# Altium PCB rpi_pico_shield_PCB.PcbDoc
Units mil, origin at the board's own origin, x right, y up, seen from the top; angles counter-clockwise.
Board outline 3800 x 3800 mil, 2 copper layers (Top Layer, Bottom Layer); 71 components, 51 nets, 232 pads, 43 vias.
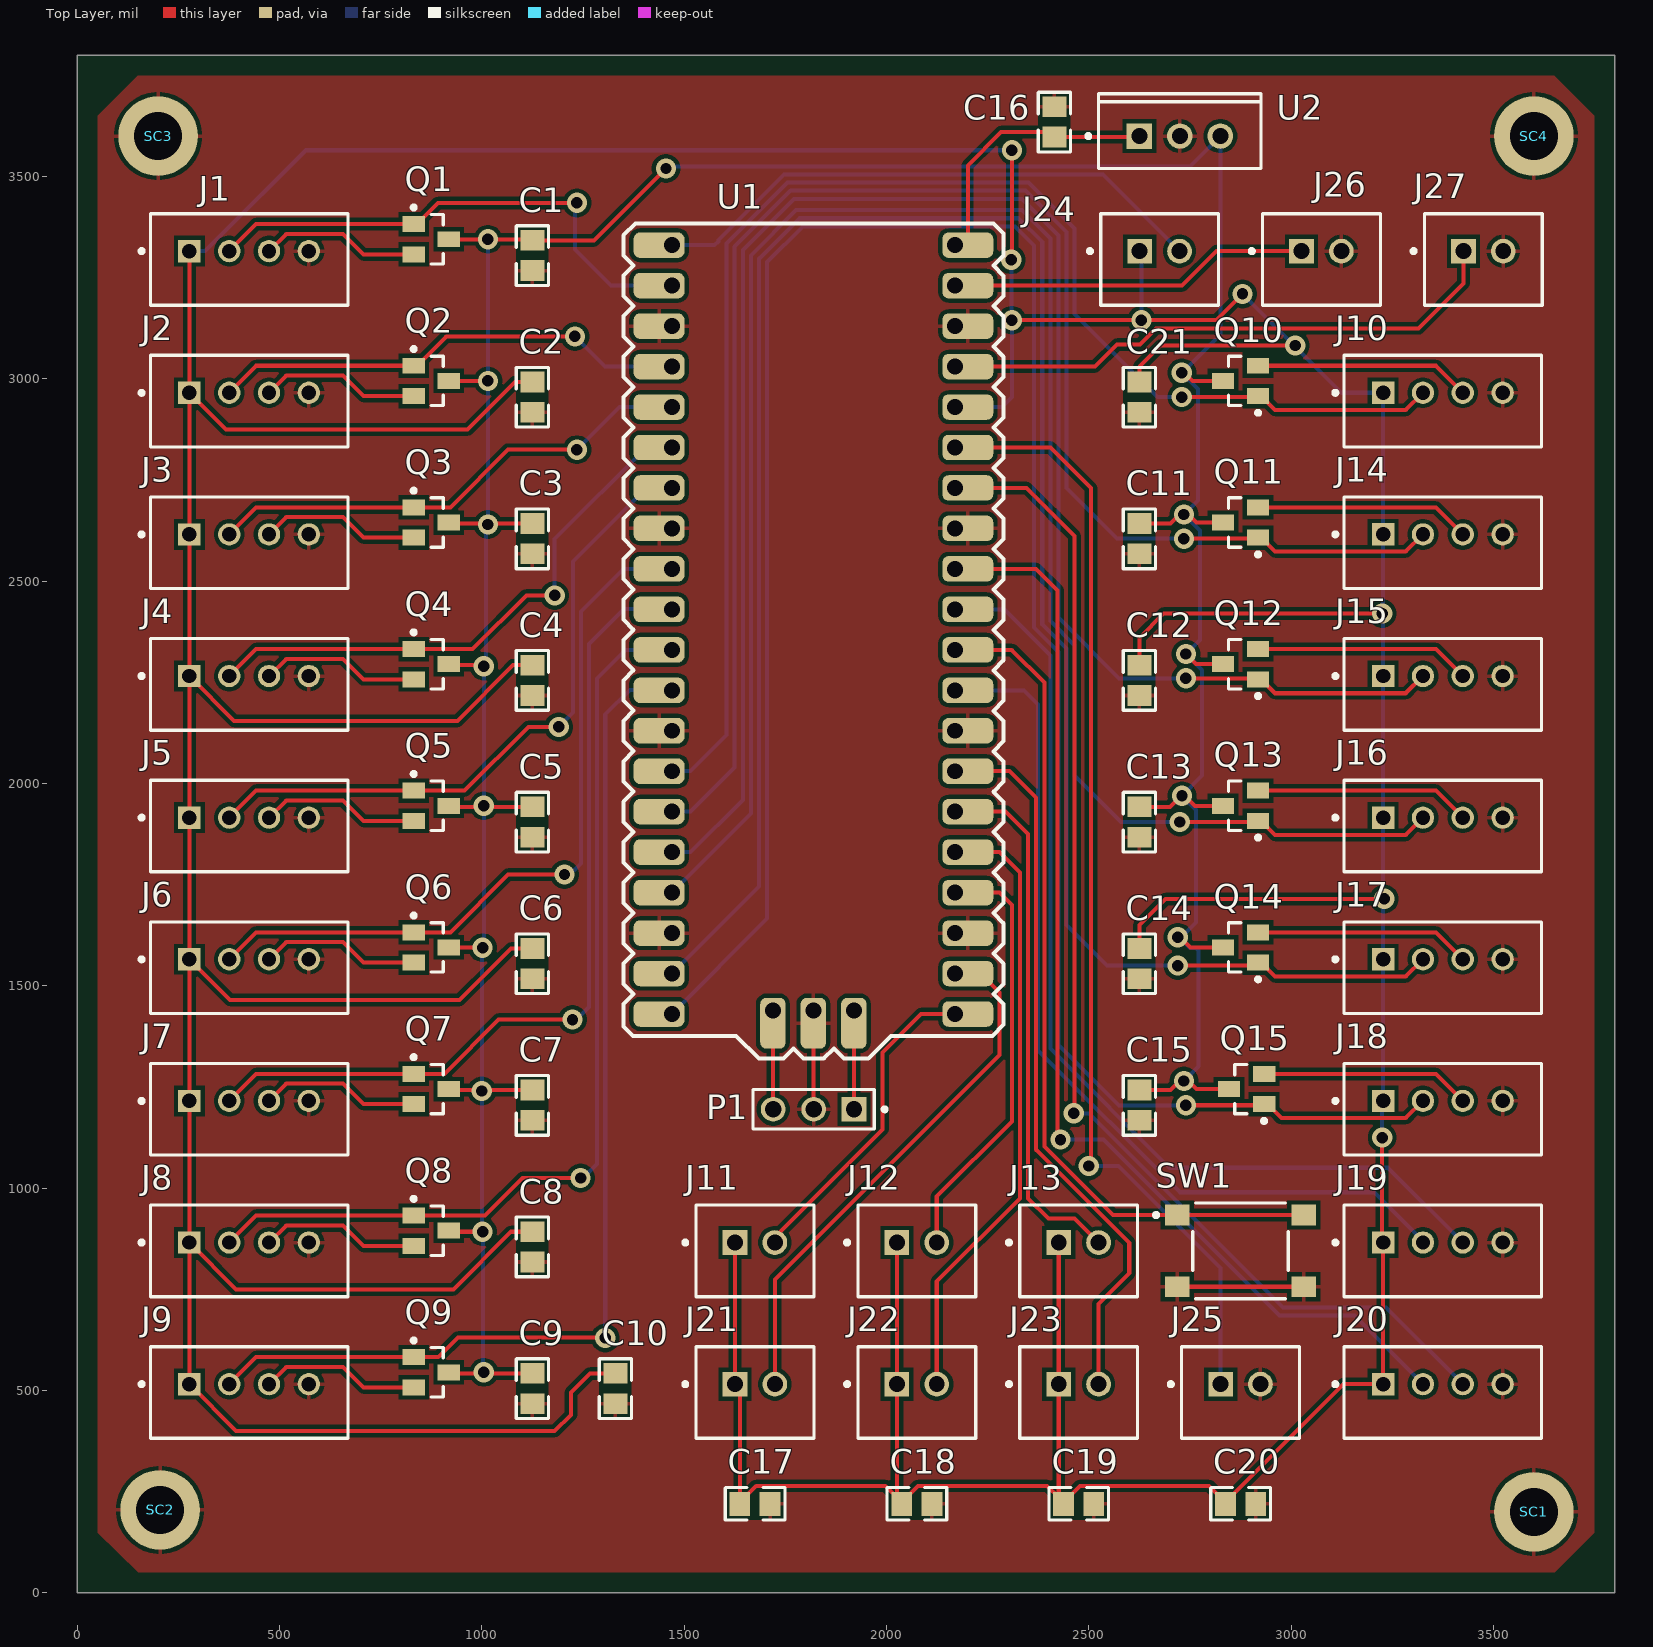
[diagram p0: Top Layer view]
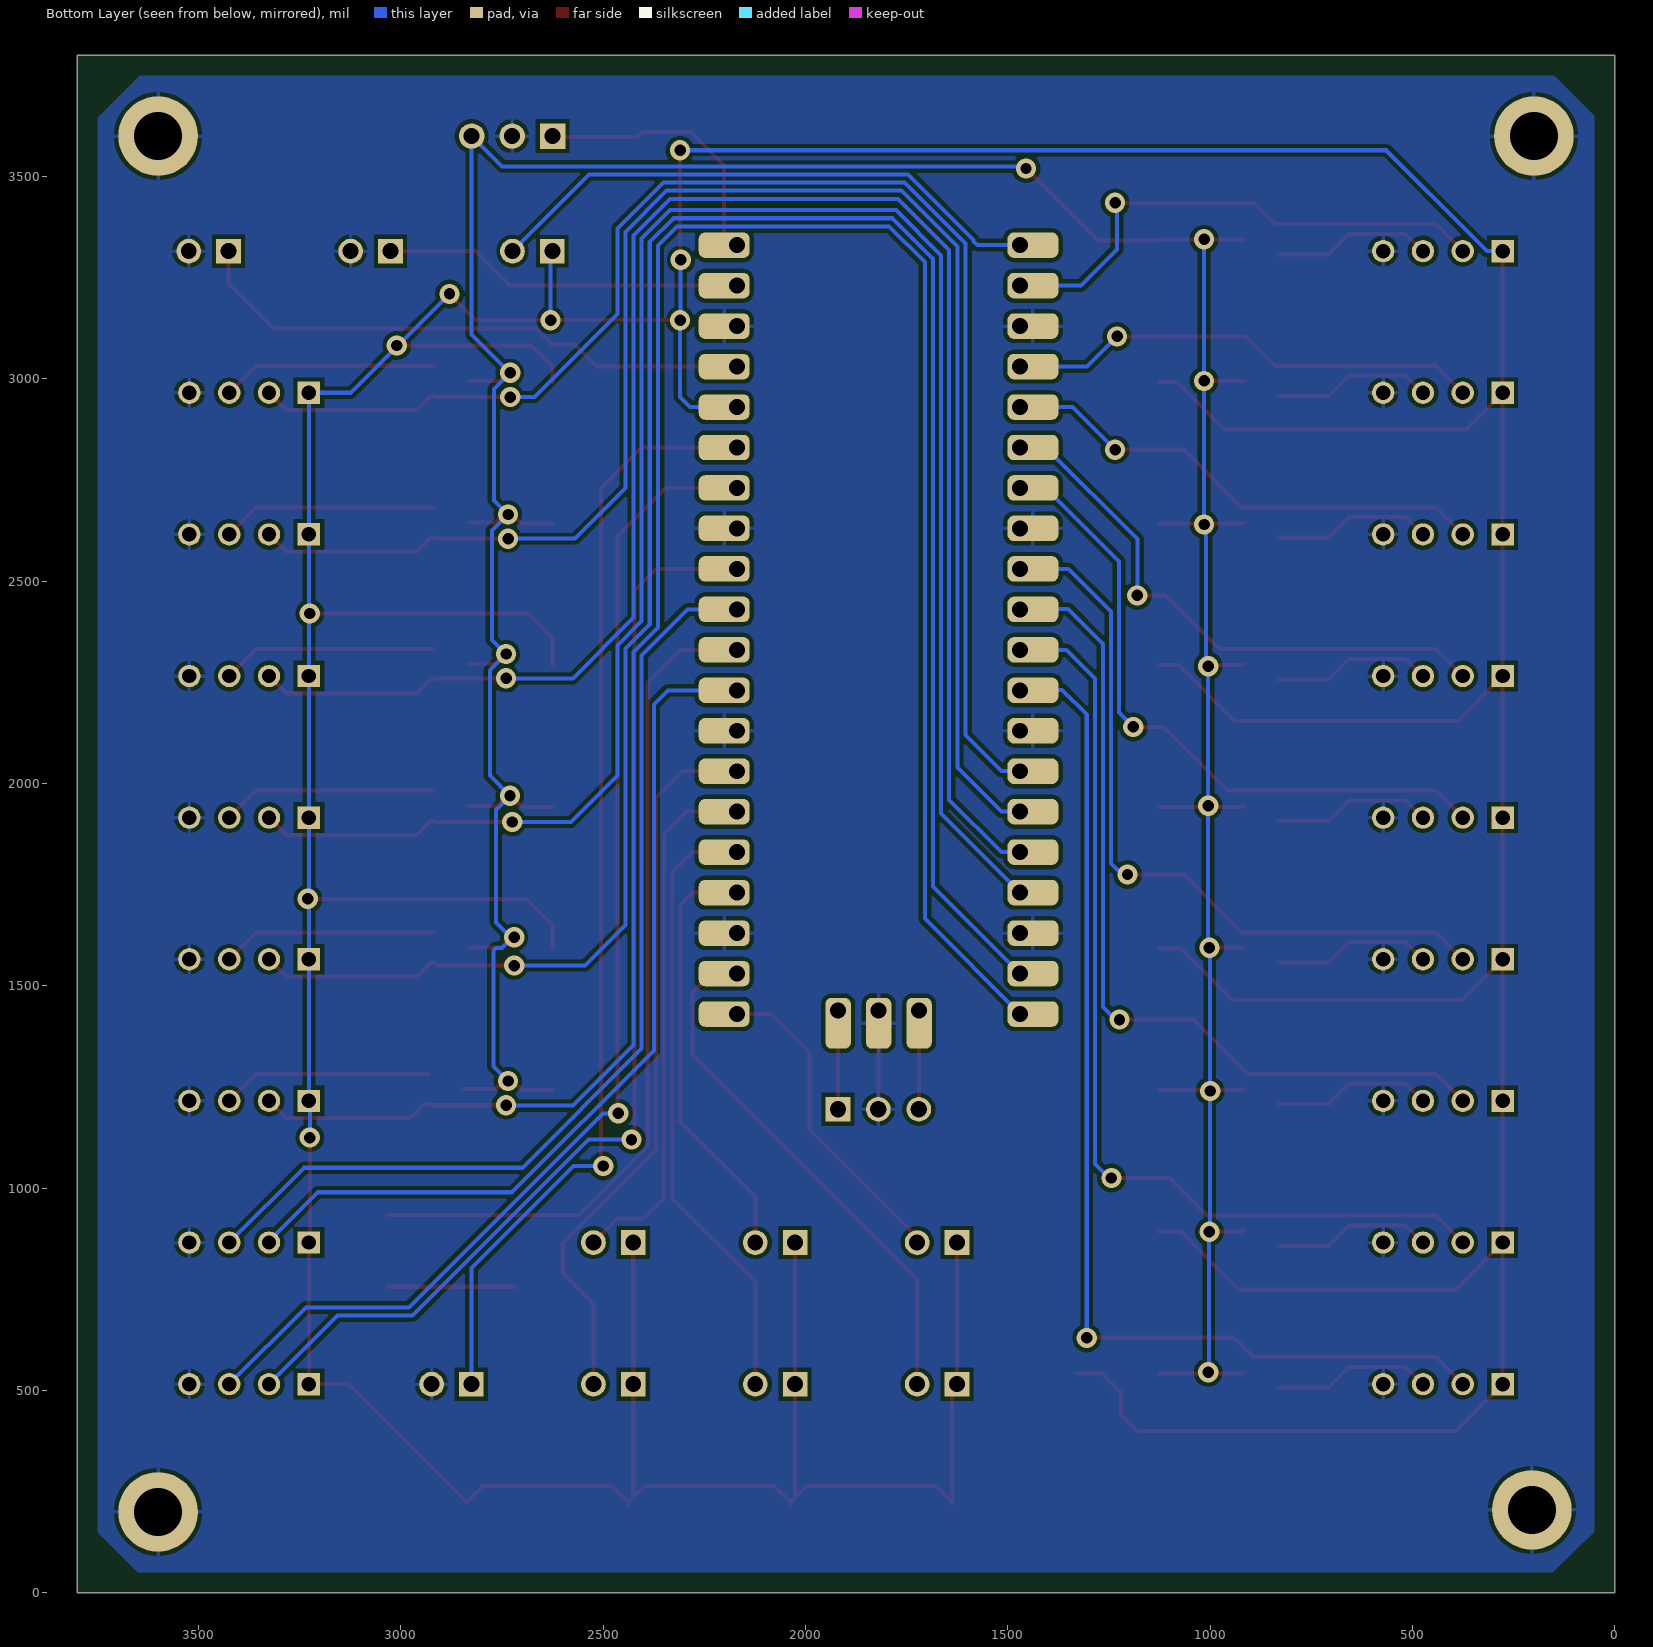
[diagram p1: Bottom Layer view, seen from below]
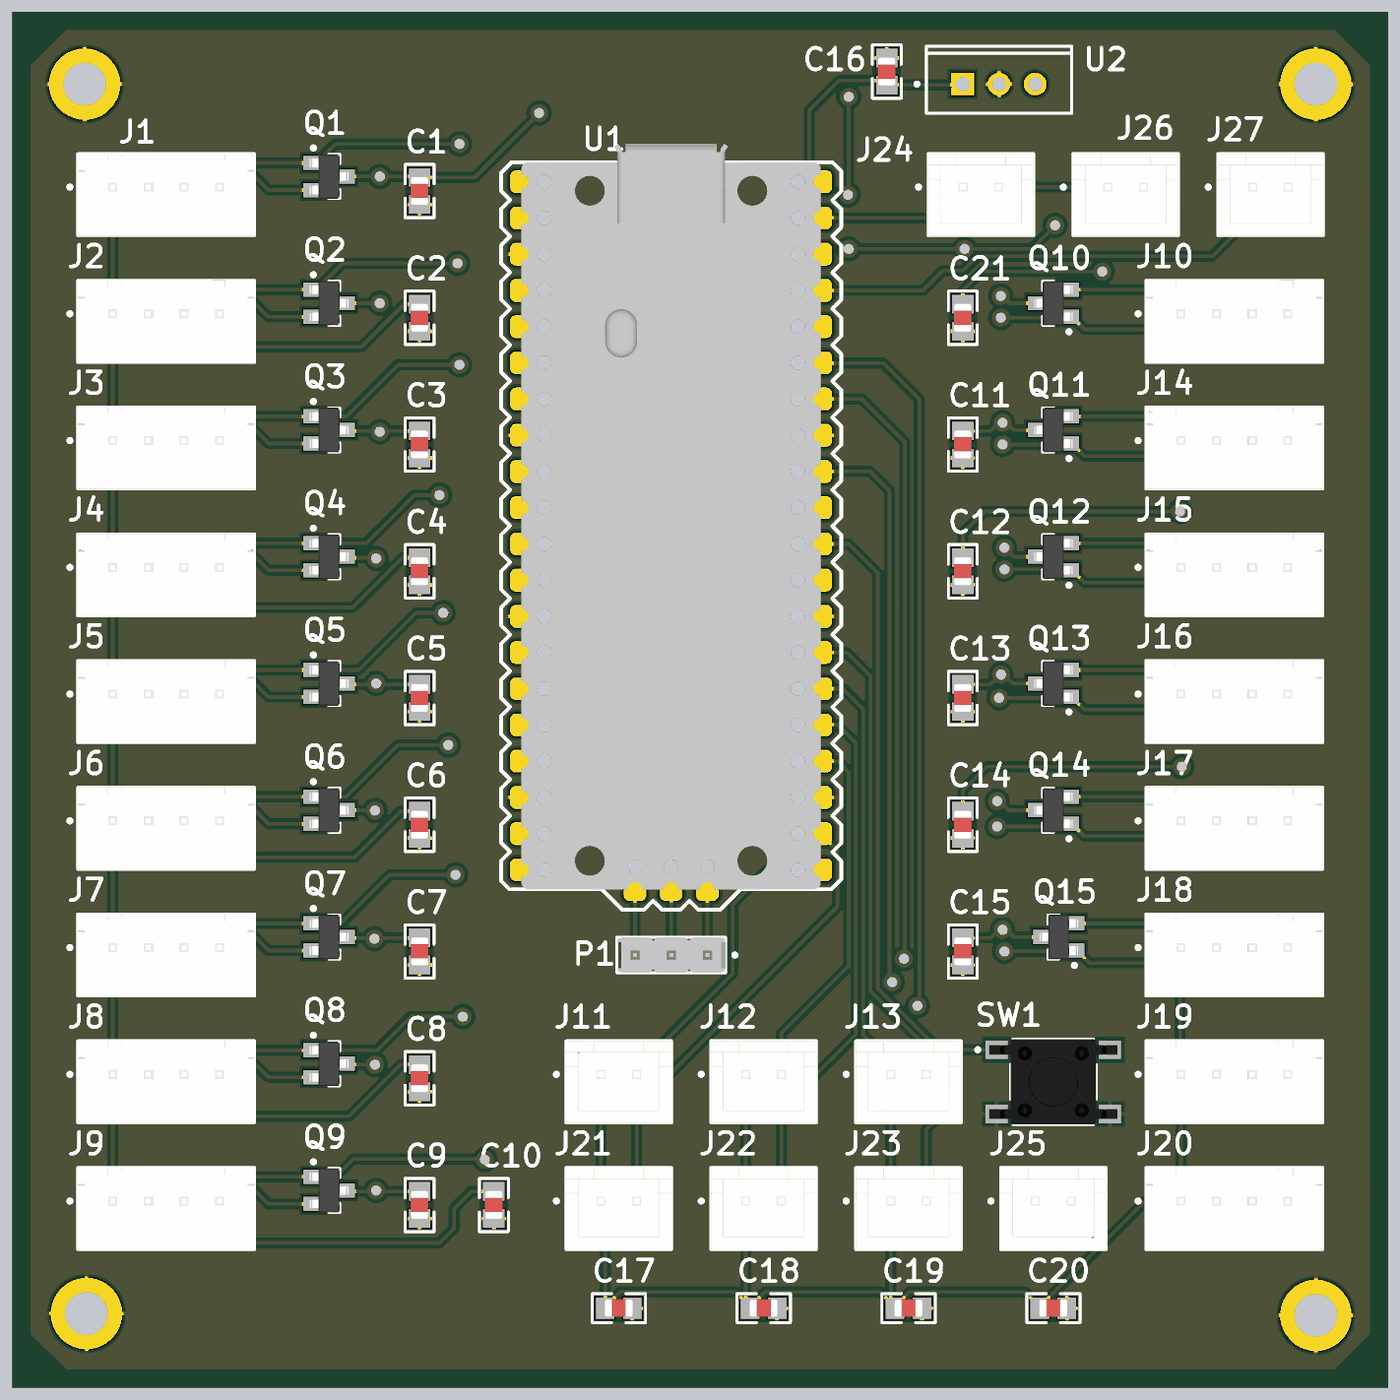
[diagram p2: 3D render of the assembled board from above, using the file's embedded part models]

## Layer stack, top to bottom
Top Solder: solder mask 0.4, Solder Resist, Dk 3.5
Top Layer: signal copper 1.4
Dielectric 1: dielectric 12.6, FR-4, Dk 4.8
Bottom Layer: signal copper 1.4
Bottom Solder: solder mask 0.4, Solder Resist, Dk 3.5

## Board outline
0,0 3800,0 3800,3800 0,3800

## Design rules (kind name [scope] priority, off if disabled: settings)
BoardOutlineClearance [All] p1: gap=50 ignorepadtopadclearanceinfootprint=FALSE
Clearance [All] p1: gap=10 ignorepadtopadclearanceinfootprint=FALSE
HoleSize HoleSize_1 [All] p1: absolutevalues=TRUE maxlimit=120 minlimit=1 maxpercent=80.000 minpercent=20.000
HoleSize [IsPad] p2: absolutevalues=TRUE maxlimit=120 minlimit=1 maxpercent=80.000 minpercent=20.000
PolygonConnect [All] p1: connectstyle=Relief reliefconductorwidth=10 reliefentries=4 polygonreliefangle="90 Angle" airgapwidth=10
RoomDefinition shield [InComponentClass('shield')] p1: confinementstyle=ConfineIn formatcopy=TRUE lockcomponents=FALSE outline 0,0 3795,0 3795,3795 0,3795
RoutingVias RoutingVias_1 [InNetClass('All Nets')] p1: holewidth=28 width=50 viastyle="Through Hole" minholewidth=28 minwidth=50 maxholewidth=120 maxwidth=200
RoutingVias [All] p2: holewidth=20 width=50 viastyle="Through Hole" minholewidth=20 minwidth=40 maxholewidth=80 maxwidth=120
SilkToSolderMaskClearance SilkToSolderMaskClearance_1 [All] p1: minsilkscreentomaskgap=2 clearancetoexposedcopper=TRUE
SilkToSolderMaskClearance [IsPad] p2: minsilkscreentomaskgap=5 clearancetoexposedcopper=TRUE
SolderMaskExpansion [All] p1: expansion=4 istentingtop=FALSE
Width [All] p1: maxlimit=10 minlimit=10 preferedwidth=10
28 further rules are at their usual default settings.

## Classes and differential pairs
component class rpi_pico: U1

## Components (designator, comment, footprint, x,y, rotation, side; value= is the part's Value field where it differs from the comment)
C1 "100nF" 0805C 1125,3305 r270 top
C2 "100nF" 0805C 1125,2955 r270 top
C3 "100nF" 0805C 1125,2605 r270 top
C4 "100nF" 0805C 1125,2255 r270 top
C5 "100nF" 0805C 1125,1905 r270 top
C6 "100nF" 0805C 1125,1555 r270 top
C7 "100nF" 0805C 1125,1205 r270 top
C8 "100nF" 0805C 1125,855 r270 top
C9 "100nF" 0805C 1125,505 r270 top
C10 "100nF" 0805C 1330,505 r270 top
C11 "100nF" 0805C 2625,2605 r270 top
C12 "100nF" 0805C 2625,2255 r270 top
C13 "100nF" 0805C 2625,1905 r270 top
C14 "100nF" 0805C 2625,1555 r270 top
C15 "100nF" 0805C 2625,1205 r270 top
C16 "100nF" 0805C 2415,3635 r270 top
C17 "100nF" 0805C 1675,220 r0 top
C18 "100nF" 0805C 2075,220 r0 top
C19 "100nF" 0805C 2475,220 r0 top
C20 "100nF" 0805C 2875,220 r0 top
C21 "100nF" 0805C 2625,2955 r270 top
J1 "B4B-XH-A(LF)(SN)" FP-B4B-XH-A_LF_SN-MFG 425,3295 r180 top
J2 "B4B-XH-A(LF)(SN)" FP-B4B-XH-A_LF_SN-MFG 425,2945 r180 top
J3 "B4B-XH-A(LF)(SN)" FP-B4B-XH-A_LF_SN-MFG 425,2595 r180 top
J4 "B4B-XH-A(LF)(SN)" FP-B4B-XH-A_LF_SN-MFG 425,2245 r180 top
J5 "B4B-XH-A(LF)(SN)" FP-B4B-XH-A_LF_SN-MFG 425,1895 r180 top
J6 "B4B-XH-A(LF)(SN)" FP-B4B-XH-A_LF_SN-MFG 425,1545 r180 top
J7 "B4B-XH-A(LF)(SN)" FP-B4B-XH-A_LF_SN-MFG 425,1195 r180 top
J8 "B4B-XH-A(LF)(SN)" FP-B4B-XH-A_LF_SN-MFG 425,845 r180 top
J9 "B4B-XH-A(LF)(SN)" FP-B4B-XH-A_LF_SN-MFG 425,495 r180 top
J10 "B4B-XH-A(LF)(SN)" FP-B4B-XH-A_LF_SN-MFG 3375,2945 r180 top
J11 "B2B-XH-A(LF)(SN)" FP-B2B-XH-A_LF_SN-MFG 1675,845 r0 top
J12 "B2B-XH-A(LF)(SN)" FP-B2B-XH-A_LF_SN-MFG 2075,845 r0 top
J13 "B2B-XH-A(LF)(SN)" FP-B2B-XH-A_LF_SN-MFG 2475,845 r0 top
J14 "B4B-XH-A(LF)(SN)" FP-B4B-XH-A_LF_SN-MFG 3375,2595 r180 top
J15 "B4B-XH-A(LF)(SN)" FP-B4B-XH-A_LF_SN-MFG 3375,2245 r180 top
J16 "B4B-XH-A(LF)(SN)" FP-B4B-XH-A_LF_SN-MFG 3375,1895 r180 top
J17 "B4B-XH-A(LF)(SN)" FP-B4B-XH-A_LF_SN-MFG 3375,1545 r180 top
J18 "B4B-XH-A(LF)(SN)" FP-B4B-XH-A_LF_SN-MFG 3375,1195 r180 top
J19 "B4B-XH-A(LF)(SN)" FP-B4B-XH-A_LF_SN-MFG 3375,845 r180 top
J20 "B4B-XH-A(LF)(SN)" FP-B4B-XH-A_LF_SN-MFG 3375,495 r180 top
J21 "B2B-XH-A(LF)(SN)" FP-B2B-XH-A_LF_SN-MFG 1675,495 r0 top
J22 "B2B-XH-A(LF)(SN)" FP-B2B-XH-A_LF_SN-MFG 2075,495 r0 top
J23 "B2B-XH-A(LF)(SN)" FP-B2B-XH-A_LF_SN-MFG 2475,495 r0 top
J24 "B2B-XH-A(LF)(SN)" FP-B2B-XH-A_LF_SN-MFG 2675,3295 r0 top
J25 "B2B-XH-A(LF)(SN)" FP-B2B-XH-A_LF_SN-MFG 2875,495 r0 top
J26 "B2B-XH-A(LF)(SN)" FP-B2B-XH-A_LF_SN-MFG 3075,3295 r0 top
J27 "B2B-XH-A(LF)(SN)" FP-B2B-XH-A_LF_SN-MFG 3475,3295 r0 top
P1 "22-28-4033" MOLX-22-28-4033_V 1820,1195 r180 top
Q1 "NDS7002A" FAIR-SOT23-3_V 875,3345 r0 top
Q2 "NDS7002A" FAIR-SOT23-3_V 875,2995 r0 top
Q3 "NDS7002A" FAIR-SOT23-3_V 875,2645 r0 top
Q4 "NDS7002A" FAIR-SOT23-3_V 875,2295 r0 top
Q5 "NDS7002A" FAIR-SOT23-3_V 875,1945 r0 top
Q6 "NDS7002A" FAIR-SOT23-3_V 875,1595 r0 top
Q7 "NDS7002A" FAIR-SOT23-3_V 875,1245 r0 top
Q8 "NDS7002A" FAIR-SOT23-3_V 875,895 r0 top
Q9 "NDS7002A" FAIR-SOT23-3_V 875,545 r0 top
Q10 "NDS7002A" FAIR-SOT23-3_V 2875,2995 r180 top
Q11 "NDS7002A" FAIR-SOT23-3_V 2875,2645 r180 top
Q12 "NDS7002A" FAIR-SOT23-3_V 2875,2295 r180 top
Q13 "NDS7002A" FAIR-SOT23-3_V 2875,1945 r180 top
Q14 "NDS7002A" FAIR-SOT23-3_V 2875,1595 r180 top
Q15 "NDS7002A" FAIR-SOT23-3_V 2890,1245 r180 top
SC1 "Screw_Hole" Screw_Hole 3600,200 r0 top
SC2 "Screw_Hole" Screw_Hole 205,205 r0 top
SC3 "Screw_Hole" Screw_Hole 200,3600 r0 top
SC4 "Screw_Hole" Screw_Hole 3600,3600 r0 top
SW1 "PTS645SH50SMTR92LFS" FP-PTS645SH50SMTR92LFS-MFG 2875,845 r0 top
U1 "RaspberryPi_Pico" PiPico_Holes 1375,1345 r0 top
U2 "LM7805ACT" FAIR-TO-220-3 2725,3600 r90 top

## Footprints (in the part's own frame and the unit in brackets; to place one, negate y for a bottom-side part, rotate by r counter-clockwise, add the part's x,y. Pads: shape width x height; smd on the part's side, far side on the other; paste and mask are expansions set on the pad)
0805C [mm] "0805 Footprint"
  rect 1.3x1.5 smd: 1(-0.95,0) 2(0.95,0)
  silkscreen extent -1.87,-1.02 1.88,1.02, body extent -1,-0.62 1,0.63, height 0.78
FAIR-SOT23-3_V [mm] "SOT23, 3-Leads, Body 3.12x1.5mm, Pitch 0.95mm"
  rect 1.4x1 smd: 1(-1.1,0.95) 2(-1.1,-0.95) 3(1.1,0)
  silkscreen extent -1.22,-1.55 0.75,2.12, body extent -1.35,-1.56 1.35,1.56, height 1.2
FAIR-TO-220-3 [mm] "FM, 3-Leads, Body 10.2x4.7mm, Pitch 2.54mm"
  rect 1.6x1.6 hole 1: 1(0,2.54)
  round 1.6 hole 1: 2(0,0) 3(0,-2.54)
  silkscreen extent -2.04,-5.1 2.66,5.87, body extent -2.04,-5.1 2.66,5.1, height 18.95
FP-B2B-XH-A_LF_SN-MFG [mm]
  rect 1.55x1.55 hole 1 paste-1000 mask+0: 1(-1.25,0.525)
  round 1.55 hole 1 paste-1000 mask+0: 2(1.25,0.525)
  silkscreen extent -4.5,-2.88 3.7,2.88, body extent -3.8,-2.98 3.8,2.98, height 0.25
FP-B4B-XH-A_LF_SN-MFG [mm]
  rect 1.4x1.4 hole 0.9 paste-1000 mask+0: 1(3.75,-0.525)
  round 1.4 hole 0.9 paste-1000 mask+0: 2(1.25,-0.525) 3(-1.25,-0.525) 4(-3.75,-0.525)
  silkscreen extent -6.2,-2.88 6.87,2.88, body extent -6.3,-2.98 6.3,2.98, height 0.25
FP-PTS645SH50SMTR92LFS-MFG [mm]
  rect 1.55x1.3 smd paste+0 mask+0: 1(-3.975,2.25) 2(3.975,2.25) 3(-3.975,-2.25) 4(3.975,-2.25)
  silkscreen extent -5.42,-3 3,3, body extent -4.85,-3.1 4.85,3.1, height 0.25
MOLX-22-28-4033_V [mm] "THD, 3-Leads, Body 7.62x2.49mm, Pitch 2.54mm"
  rect 1.55x1.55 hole 1.02: 1(-2.54,0)
  round 1.55 hole 1.02: 2(0,0) 3(2.54,0)
  silkscreen extent -4.59,-1.24 3.81,1.24, body extent -3.81,-1.24 3.81,1.24, height 8.38
PiPico_Holes [mm]
  rrect50% 3.2x1.6 hole 1 copper offset -0.8,0: 1(2.4,50.43) 2(2.4,47.89) 3(2.4,45.35) 4(2.4,42.81) 5(2.4,40.27) 6(2.4,37.73) 7(2.4,35.19) 8(2.4,32.65) 9(2.4,30.11) 10(2.4,27.57) 11(2.4,25.03) 12(2.4,22.49) 13(2.4,19.95) 14(2.4,17.41) 15(2.4,14.87) 16(2.4,12.33) 17(2.4,9.79) 18(2.4,7.25) 19(2.4,4.71) 20(2.4,2.17)
  rrect50% 3.2x1.6 hole 1 copper offset 0.8,0: 21(20.18,2.17) 22(20.18,4.71) 23(20.18,7.25) 24(20.18,9.79) 25(20.18,12.33) 26(20.18,14.87) 27(20.18,17.41) 28(20.18,19.95) 29(20.18,22.49) 30(20.18,25.03) 31(20.18,27.57) 32(20.18,30.11) 33(20.18,32.65) 34(20.18,35.19) 35(20.18,37.73) 36(20.18,40.27) 37(20.18,42.81) 38(20.18,45.35) 39(20.18,47.89) 40(20.18,50.43)
  rrect50% 1.6x3.2 hole 1 copper offset 0,-0.8: 41(8.75,2.39) 42(11.29,2.39) 43(13.83,2.39)
  silkscreen extent -0.64,-0.64 23.23,51.8, body extent 0.79,0.8 21.79,53.1, height 3.74
Screw_Hole [mm]
  round 5 hole 3: ""(0,0)

## Part data
C1 C2 C3 C4 C5 C6 C7 C8 C9 C10 C11 C12 C13 C14 C15 C16 C17 C18 C19 C20 C21: library part C, "Capacitor", Reviewed by="RM - 2018/08/05", Revision="July-2002: Re-released for DXP Platform."
J1 J2 J3 J4 J5 J6 J7 J8 J9 J10 J14 J15 J16 J17 J18 J19 J20: library part CMP-17439-000250-1, "CONN HEADER VERT 4POS 2.5MM", Color=Natural, Contact Resistance=20mR, Current Rating=3A, Flammability Rating="UL94 V-0", Housing Color=White, Insulation Resistance=1GR, Max Operating Temperature=85°C, Max Voltage Rating (AC)=250V, Min Operating Temperature=-25°C, Package Quantity=500, Connector Type=Header, Contact Finish - Mating=TIN, Contact Material=Brass, Contact Plating=Tin, Contact Shape=Square, Contact Type="Male Pin", Depth=5.75mm, Fastening Type=Detent, Gender=Male, Housing Material=Polyamide, Insulation Color=Natural, Insulation Material=Nylon, Lead Free="Lead Free", Lead Pitch=2.5mm, Length=12.4mm, Mated Stacking Heights=9.8mm, Material=Polyamide, Max Current Rating=3A, Max Voltage Rating (DC)=250V, Mount="Through Hole", Number of Contacts=4, Number of Positions=4, Number of Rows=1, Orientation=Straight, Packaging=Bulk, Pitch=2.5mm, REACH SVHC="No SVHC", Series=XH, Termination=Solder, Voltage Rating=250V, Voltage Rating (AC)=250V, Wire/Cable Gauge=22AWG
J11 J12 J13 J21 J22 J23 J24 J25 J26 J27: library part CMP-2000-05888-3, "CONN HEADER VERT 2POS 2.5MM", Color=Natural, Contact Resistance=20mR, Current Rating=3A, Housing Color=White, Insulation Resistance=1GR, Max Operating Temperature=85°C, Max Voltage Rating (AC)=250V, Min Operating Temperature=-25°C, Connector Type="Male Pin", Contact Material=Brass, Contact Plating=Tin, Contact Type="Male Pin", Depth=5.75mm, Fastening Type=Detent, Housing Material=Polyamide, Lead Free="Lead Free", Lead Pitch=2.5mm, Length=7.4mm, Max Current Rating=3A, Max Voltage Rating (DC)=250V, Mount="Through Hole", Number of Contacts=2, Number of Positions=2, Number of Rows=1, Orientation=Straight, Packaging=Bulk, Pitch=2.5mm, REACH SVHC="No SVHC", Series=XH, Termination=Solder, Voltage Rating=250V, Voltage Rating (AC)=250V, Wire/Cable Gauge=22AWG
P1: library part CMP-1676-00001-5, "Male Header, Pitch 2.54 mm, 1 x 3 Position, Height 8.38 mm, Tail Length 3.18 mm, RoHS, Bulk", Colour=Black, Current Rating="4 A", Manufacturer=Molex, Max Operating Temperature="75 degC", Min Operating Temperature="0 degC", Package Quantity=1, Voltage Rating="250 V", ComponentLink1Description="Manufacturer URL", ComponentLink1URL=http://www.molex.com/, ComponentLink2Description=Datasheet, ComponentLink2URL=http://www.molex.com/pdm_docs/sd/022284033_sd.pdf, Contact Finish=Gold, Contact Material=Brass, Contact Plating=Gold, DatasheetVersion="Rev. G, 01/2012", Height="8.38 mm", Lead Pitch="0.1 inch", Length="7.62 mm", Mount="Through Hole", Mounting Technology="Through Hole", PackageDescription="Male Header, Pitch 2.54 mm, 1 x 3 Position, Height 8.38 mm, Tail Length 3.18 mm", PackageReference=22-28-4033, Packaging=Bulk, Pins=3, REACH SVHC=Unknown, RoHSCompliant=true, Rows=1
Q1 Q2 Q3 Q4 Q5 Q6 Q7 Q8 Q9 Q10 Q11 Q12 Q13 Q14 Q15: library part CMP-2000-06836-1, "N-Channel Enhancement Mode Field Effect Transistor, 60 V, 280 mA, -65 to 150 degC, 3-Pin SOT23 (TO-236AB), RoHS, Tape and Reel", Continuous Drain Current Id=280mA, Current Temperature=25°C, Drain Source Voltage Vds=60V, Manufacturer="Fairchild Semiconductor", On Resistance Rds(on)=2ohm, Operating Temperature Max=150°C, Operating Temperature Min=-65°C, Operating Temperature Range=-65°Cto+150°C, Package Description="3-Pin Small Outline Transistor, Body 2.92 x 1.325 mm, Pitch 0.95 mm", Package Reference=SOT23-3, Package Version="Rev. 12, 03/2016", Power Dissipation Pd=300mW, Pulse Current Idm=1.5A, Rds(on) Test Voltage Vgs=10V, Threshold Voltage Vgs=2.1V, Transistor Case Style=SOT-23, Voltage Vgs th Max=2.5V, Current Id Max=280mA, Datasheet URL=https://www.fairchildsemi.com/datasheets/ND/NDS7002A.pdf, Datasheet Version="Rev. 2.10, 08/2016", Device Marking=NDS7002A, External Depth=2.5mm, External Length / Height=1.12mm, External Width=3.05mm, Full Power Rating Temperature=25°C, Manufacturer URL=https://www.fairchildsemi.com/, Mounting Technology=SurfaceMount, MSL=MSL1-Unlimited, No. of Pins=3, No. of Transistors=1, Package URL=http://www.fairchildsemi.com/dwg/MA/MA03D.pdf, Packaging=CutTape, SMD Marking=712, SVHC=NoSVHC(16-Jun-2014), Tape Width=8mm, Transistor Polarity=NChannel, Voltage Vds Typ=60V, Voltage Vgs Max=2.1V, Voltage Vgs Rds on Measurement=10V
SC1 SC2 SC3 SC4: "Screw Hole"
SW1: library part CMP-10040-000028-1, "SWITCH TACTILE SPST-NO 0.05A 12V", Case/Package=SMD/SMT, Color=Black, Current Rating=50mA, Max Operating Temperature=60°C, Max Voltage Rating (DC)=12V, Min Operating Temperature=-20°C, Operating Force=200gf, Package Quantity=1000, Actuator Material=Nylon, Actuator Type=Standard, Contact Material=Bronze, Contact Plating=Silver, Depth=9mm, Illumination Type=Non-Illuminated, Lead Free="Lead Free", Length=6mm, Max Current Rating=50mA, Mechanical Life=100000Cycles, Mount="Surface Mount", Orientation=Straight, Packaging="Tape and Reel", REACH SVHC="No SVHC", Switch Function=Off-Mom, Termination="Gull Wing", Throw Configuration=SPST, Voltage Rating (DC)=12V
U2: library part CMP-2000-04937-1, "Positive Voltage Regulator, 5 V, 1 A, 0 to 125 degC, 3-Pin TO-220, RoHS, Tube", Dropout Voltage Measurement Current=1A, Manufacturer=Fairchild, Maximum Input Voltage=35V, Maximum Operating Temperature=+125degC, Minimum Operating Temperature=0degC, Output Voltage=5V, Package Description="3-Pin Through Hole Device, Body 10 x 4.5 mm, Pitch 2.54 mm", Package Reference=TO-220, Quiescent Current=6mA, Typical Dropout Voltage @ Current=2V@1A, Datasheet URL=https://datasheet.ciiva.com/5816/1359194-5816420.pdf, Datasheet Version="Rev. 1.0.1, 05/2006", Dimensions=10.67x4.83x16.51mm, Height=16.51mm, Length=10.67mm, Line Regulation=50mV, Load Regulation=100mV, Manufacturer URL=https://www.fairchildsemi.com/, Maximum Output Current=1A, Mounting Type=ThroughHole, Number of Outputs=1, Output Type=Fixed, Package Type=TO-220, Package URL=https://www.fairchildsemi.com/package-drawings/TO/TO220B03.pdf, Pin Count=3, Polarity=Positive, Regulator Function=Linear, Series=LM78xx, Width=4.83mm

## Via types
v1: diameter 50, hole 28, Top Layer to Bottom Layer, tented both sides, 43 vias

## Nets (pads, with @x,y where several pads share a name; then routed paths per layer and width w, separated by ;. In a path a pad name is that pad's centre, name@x,y a point inside that pad or via, vN(x,y) a via of type N, cw(c..) or ccw(c..) an arc to the next point about the centre after c; other vN are vias at no path point)
3V3_EN: J27.1 U1.37 | length 1421.2
  Top Layer w10: U1.37 2515.43,3030.43 2570,3085 2626.57,3085 2666.57,3125 3315,3125 3425.79,3235.79 J27.1
ADC_VREF: J25.1 U1.35 | length 2771.5
  Top Layer w10: U1.35 2169.92,2830 2405,2830 2505,2730 2505,1060 v1(2500,1055)
  Bottom Layer w10: v1(2500,1055) 2573.43,1055 2825.79,802.64 J25.1
DVCC: C2.1 C4.1 C6.1 C8.1 C10.1 C12.1 C14.1 C17.1 C18.1 C19.1 C20.1 C21.1 J1.1 J2.1 J3.1 J4.1 J5.1 J6.1 J7.1 J8.1 J9.1 J10.1 J11.1 J12.1 J13.1 J14.1 J15.1 J16.1 J17.1 J18.1 J19.1 J20.1 J21.1 J22.1 J23.1 J24.1 U1.36 | length 19896.6
  Top Layer w10: J1.1 J2.1 ; C8.1 1072.4,892.4 930,750 393.03,750 J8.1 ; C6.1 1072.4,1592.4 945,1465 378.03,1465 J6.1 ; C4.1 1077.4,2292.4 940,2155 388.03,2155 J4.1 ; C2.1 1082.4,2992.4 965,2875 368.03,2875 J2.1 ; C10.1 1267.4,542.4 1220,495 1220,440 1180,400 393.03,400 J9.1 J8.1 ; J11.1 J21.1 1637.6,503.86 C17.1@1637.6,223.94 ; C17.1 C17.1@1637.6,223.94 ; J12.1 J22.1 C18.1@2025.79,235.75 ; C18.1 C18.1@2037.6,223.94 ; v1(2308.23,3294.24) 2310,3296.01 v1(2310,3565) ; v1(2310,3145) v1(2630,3145) 2815,3145 v1(2880,3210) ; J13.1 J23.1 C19.1@2425.79,235.75 ; C19.1 C19.1@2437.6,223.94 ; C14.1 2625,1650 2690,1715 v1(3230,1715) ; C12.1 2625,2360 2685,2420 v1(3225,2420) ; C21.1 2625,3030 2677.31,3082.31 v1(3010.05,3082.31) ; v1(3225,1125) 3225,868.03 J19.1 J20.1 3129.33,515.67 2837.6,223.94 2797.01,264.53 2478.19,264.53 C19.1@2437.6,223.94 ; J8.1 J7.1 J6.1 ; J6.1 J5.1 J4.1 ; J4.1 J3.1 J2.1 ; C17.1@1637.6,223.94 1678.19,264.53 1997.01,264.53 C18.1@2025.79,235.75 ; C18.1@2025.79,235.75 C18.1@2037.6,223.94 ; C18.1@2037.6,223.94 2078.19,264.53 2397.01,264.53 C19.1@2425.79,235.75 ; C19.1@2425.79,235.75 C19.1@2437.6,223.94
  Bottom Layer w10: J1.1 315.67,3315.67 344.28,3344.28 cw(c375.79,3315.67) 347.18,3347.18 565,3565 v1(2310,3565) ; U1.36 2285.43,2930.43 2310,2955 v1(2310,3145) 2309.12,3145.88 2309.12,3293.36 v1(2308.23,3294.24) ; J24.1 2630,3311.46 v1(2630,3145) ; v1(2880,3210) 3124.33,2965.67 J10.1 J14.1 J15.1 J16.1 J17.1 J18.1 3225,1213.31 v1(3225,1125)
GND: C1.2 C2.2 C3.2 C4.2 C5.2 C6.2 C7.2 C8.2 C9.2 C10.2 C11.2 C12.2 C13.2 C14.2 C15.2 C16.1 C17.2 C18.2 C19.2 C20.2 C21.2 J1.4 J2.4 J3.4 J4.4 J5.4 J6.4 J7.4 J8.4 J9.4 J10.4 J14.4 J15.4 J16.4 J17.4 J18.4 J19.4 J20.4 J25.2 J26.2 J27.2 P1.2 SC1. SC2. SC3. SC4. SW1.3 SW1.4 U1.3 U1.8 U1.13 U1.18 U1.23 U1.28 U1.33 U1.38 U1.42 U2.2 | length 557.3
  Top Layer w10: U1.42 1820,1438.58 P1.2 ; SW1.3 SW1.4
LED01: J1.3 Q1.2 | length 396.1
  Top Layer w10: J1.3 516.77,3358.23 656.77,3358.23 707.4,3307.6 Q1.2
LED02: J2.3 Q2.2 | length 396.1
  Top Layer w10: J2.3 516.77,3008.23 656.76,3008.23 707.39,2957.6 Q2.2
LED03: J3.3 Q3.2 | length 396.1
  Top Layer w10: J3.3 516.77,2658.23 656.76,2658.23 707.39,2607.6 Q3.2
LED04: J4.3 Q4.2 | length 396.1
  Top Layer w10: J4.3 516.77,2308.23 656.76,2308.23 707.39,2257.6 Q4.2
LED05: J5.3 Q5.2 | length 396.1
  Top Layer w10: J5.3 516.77,1958.23 656.76,1958.23 707.39,1907.6 Q5.2
LED06: J6.3 Q6.2 | length 396.1
  Top Layer w10: J6.3 516.77,1608.23 656.76,1608.23 707.39,1557.6 Q6.2
LED07: J7.3 Q7.2 | length 396.1
  Top Layer w10: J7.3 516.77,1258.23 656.76,1258.23 707.39,1207.6 Q7.2
LED08: J8.3 Q8.2 | length 396.1
  Top Layer w10: J8.3 516.77,908.23 656.76,908.23 707.39,857.6 Q8.2
LED09: J9.3 Q9.2 | length 396.1
  Top Layer w10: J9.3 516.77,558.23 656.76,558.23 707.39,507.6 Q9.2
LED10: J10.3 Q10.2 | length 533.5
  Top Layer w10: Q10.2 3357.48,3032.4 J10.3
LED11: J14.3 Q11.2 | length 533.5
  Top Layer w10: Q11.2 3357.48,2682.4 J14.3
LED12: J15.3 Q12.2 | length 533.5
  Top Layer w10: Q12.2 3357.48,2332.4 J15.3
LED13: J16.3 Q13.2 | length 533.5
  Top Layer w10: Q13.2 3357.48,1982.4 J16.3
LED14: J17.3 Q14.2 | length 533.5
  Top Layer w10: Q14.2 3357.48,1632.4 J17.3
LED15: J18.3 Q15.2 | length 518.5
  Top Layer w10: Q15.2 3357.48,1282.4 J18.3
LEDS_1: J19.2 U1.29 | length 2224.5
  Bottom Layer w10: U1.29 2339.57,2230.43 2375,2195 2375,1340 2725,990 3205,990 3325.79,869.21 J19.2
LEDS_2: J19.3 U1.31 | length 2472.2
  Bottom Layer w10: U1.31 2291.43,2430.43 2405,2316.86 2405,1345 2699.53,1050.47 3239.41,1050.47 J19.3
LEDS_3: J20.2 U1.32 | length 2781.7
  Top Layer w10: U1.32 2369.57,2530.43 2422.57,2477.43 2422.57,1127.43 v1(2430,1120)
  Bottom Layer w10: v1(2430,1120) 2536.72,1120 2971.72,685 3156.46,685 J20.2
LEDS_4: J20.3 U1.34 | length 3011.3
  Top Layer w10: U1.34 2346.28,2730.43 2465,2611.72 2465,1187.43 v1(2462.57,1185)
  Bottom Layer w10: v1(2462.57,1185) 2500,1185 2980,705 3234.88,705 J20.3
RUN: SW1.1 SW1.2 U1.30 | length 2112.3
  Top Layer w10: U1.30 2309.57,2330.43 2390,2250 2390,1103.28 2559.7,933.58 SW1.1 SW1.2
S00: J24.2 U1.1 | length 1407.3
  Bottom Layer w10: U1.1 1575.43,3330.43 1585,3340 1585,3343.14 1746.86,3505 2359.71,3505 2534.88,3505 J24.2
S01: J1.2 Q1.1 U1.2 | length 1302.3
  Top Layer w10: J1.2 442.52,3382.4 Q1.1 839.57,3382.4 892.17,3435 v1(1235,3435)
  Bottom Layer w10: v1(1235,3435) 1230,3430 1230,3320 1319.57,3230.43 U1.2
S02: J2.2 Q2.1 U1.4 | length 1182.3
  Top Layer w10: J2.2 442.52,3032.4 Q2.1 839.57,3032.4 912.17,3105 v1(1230,3105)
  Bottom Layer w10: v1(1230,3105) 1304.57,3030.43 U1.4
S03: J3.2 Q3.1 U1.5 | length 1224.1
  Top Layer w10: J3.2 442.52,2682.4 Q3.1 922.4,2682.4 1065,2825 v1(1235,2825)
  Bottom Layer w10: v1(1235,2825) 1340.43,2930.43 U1.5
S04: J4.2 Q4.1 U1.6 | length 1409
  Top Layer w10: J4.2 442.52,2332.4 Q4.1 977.4,2332.4 1110,2465 v1(1180,2465)
  Bottom Layer w10: v1(1180,2465) 1180,2603.94 1406.5,2830.43 U1.6
S05: J5.2 Q5.1 U1.7 | length 1650.2
  Top Layer w10: J5.2 442.52,1982.4 Q5.1 839.57,1982.4 957.4,1982.4 1115,2140 v1(1190,2140)
  Bottom Layer w10: v1(1190,2140) 1225,2175 1225,2548.94 1406.5,2730.43 U1.7
S06: J6.2 Q6.1 U1.9 | length 1858
  Top Layer w10: J6.2 442.52,1632.4 Q6.1 922.4,1632.4 1065,1775 v1(1204.18,1775)
  Bottom Layer w10: v1(1204.18,1775) 1215.01,1775 1226.62,1786.61 1229.14,1786.61 1245,1802.47 1245,2425 1350.43,2530.43 U1.9
S07: J7.2 Q7.1 U1.10 | length 2122.7
  Top Layer w10: J7.2 442.52,1282.4 Q7.1 907.4,1282.4 1041.59,1416.59 v1(1224.18,1416.59)
  Bottom Layer w10: v1(1224.18,1416.59) 1233.69,1416.59 1265,1447.9 1265,2345 1350.86,2430.86 1469.06,2430.86 U1.10
S08: J8.2 Q8.1 U1.11 | length 2403.4
  Top Layer w10: J8.2 442.52,932.4 Q8.1 1007.91,932.4 1100.51,1025 v1(1244.18,1025)
  Bottom Layer w10: v1(1244.18,1025) 1250,1025 1285,1060 1285,2260 1355.43,2330.43 U1.11
S09: J9.2 Q9.1 U1.12 | length 2707.6
  Top Layer w10: J9.2 442.52,582.4 Q9.1 892.4,582.4 941.39,631.39 1303.61,631.39 v1(1305,630)
  Bottom Layer w10: v1(1305,630) 1305,2170 1365.86,2230.86 1469.06,2230.86 U1.12
S10: J10.2 Q10.1 U1.14 | length 3547.1
  Top Layer w10: v1(2730,2955) 2915.71,2955 Q10.1 2926.18,2957.6 2960.67,2923.11 3283.23,2923.11 J10.2
  Bottom Layer w10: U1.14 1515.98,2030.43 1605,2119.45 1605,3334.85 1755.15,3485 2351.42,3485 2465,3371.42 2465,3160 2670,2955 v1(2730,2955)
S11: J14.2 Q11.1 U1.15 | length 4006
  Top Layer w10: v1(2735,2605) 2915.71,2605 Q11.1 2926.18,2607.6 2960.67,2573.11 3283.23,2573.11 J14.2
  Bottom Layer w10: U1.15 1515.98,1930.43 1625,2039.45 1625,3326.57 1763.43,3465 2343.14,3465 2445,3363.14 2445,2730 2570,2605 v1(2735,2605)
S12: J15.2 Q12.1 U1.16 | length 4398.3
  Top Layer w10: v1(2740,2260) 2915.91,2260 Q12.1 2926.18,2257.6 2960.67,2223.11 3283.23,2223.11 J15.2
  Bottom Layer w10: U1.16 1515.98,1830.43 1645,1959.45 1645,3318.28 1771.72,3445 2334.85,3445 2425,3354.85 2425,2410 2575,2260 v1(2740,2260)
S13: J16.2 Q13.1 U1.17 | length 4764
  Top Layer w10: v1(2725,1905) 2915.71,1905 Q13.1 2926.18,1907.6 2960.67,1873.11 3283.23,1873.11 J16.2
  Bottom Layer w10: U1.17 1665,1925.94 1665,3305.15 1776.78,3416.93 2334.64,3416.93 2405,3346.57 2405,2401.72 2465,2341.72 2465,2020 2580,1905 v1(2725,1905)
S14: J17.2 Q14.1 U1.19 | length 5291.8
  Top Layer w10: v1(2720,1550) 2910.71,1550 Q14.1 2926.18,1557.6 2960.67,1523.11 3283.23,1523.11 J17.2
  Bottom Layer w10: U1.19 1685,1745.94 1685,3296.86 1785.07,3396.93 2326.36,3396.93 2385,3338.28 2385,2393.43 2445,2333.43 2445,1650 2545,1550 v1(2720,1550)
S15: J18.2 Q15.1 U1.20 | length 5669.2
  Top Layer w10: v1(2740,1205) 2930.71,1205 Q15.1 2941.18,1207.6 2975.67,1173.11 3283.23,1173.11 J18.2
  Bottom Layer w10: U1.20 1705,1665.94 1705,3288.58 1793.35,3376.93 2318.07,3376.93 2365,3330 2365,2385.15 2425,2325.15 2425,1353.28 2574.14,1204.14 2739.14,1204.14 v1(2740,1205)
S16: J11.2 U1.21 | length 798.4
  Top Layer w10: J11.2 1724.21,879.21 1990,1145 1990,1335 2085.43,1430.43 U1.21
S17: J21.2 U1.22 | length 1326.8
  Top Layer w10: J21.2 1724.21,774.21 2278.98,1328.98 2278.98,1483.94 2232.48,1530.43 U1.22
S18: J12.2 U1.24 | length 1064.4
  Top Layer w10: J12.2 2124.21,979.21 2310,1165 2310,1700 2279.57,1730.43 U1.24
S19: J22.2 U1.25 | length 1531
  Top Layer w10: J22.2 2124.21,769.21 2330,975 2330,1780 2279.57,1830.43 U1.25
S20: J13.2 U1.26 | length 1323
  Top Layer w10: U1.26 2294.57,1930.43 2350,1875 2350,975 2400,925 2464.88,925 J13.2
S21: J23.2 U1.27 | length 1803.6
  Top Layer w10: U1.27 2304.57,2030.43 2370,1965 2370,1095 2600,865 2600,790 2524.21,714.21 J23.2
SWCLK: P1.3 U1.41 | length 244.3
  Top Layer w10: U1.41 1720,1438.58 P1.3
SWDIO: P1.1 U1.43 | length 244.3
  Top Layer w10: U1.43 1919.49,1195.51 P1.1
VCC: C16.2 U1.40 U2.1 | length 677.9
  Top Layer w10: U1.40 2195.17,3356.11 2200.98,3356.11 2200.98,3527.55 2283.43,3610 2402.6,3610 C16.2 2622.6,3597.6 U2.1
VCCR: C1.1 C3.1 C5.1 C7.1 C9.1 C11.1 C13.1 C15.1 Q1.3 Q2.3 Q3.3 Q4.3 Q5.3 Q6.3 Q7.3 Q8.3 Q9.3 Q10.3 Q11.3 Q12.3 Q13.3 Q14.3 Q15.3 U2.3 | length 9611.2
  Top Layer w10: Q9.3 920.91,542.4 C9.1 ; Q8.3 920.91,892.4 v1(1001.92,892.4) ; Q7.3 920.91,1242.4 C7.1 ; Q6.3 v1@1001.92,1595 ; Q5.3 920.91,1942.4 C5.1 ; Q4.3 920.91,2292.4 v1@1005,2292.4 ; Q3.3 920.91,2642.4 C3.1 ; Q2.3@920.91,2992.4 Q2.3 v1(1015,2995) ; Q1.3@920.91,3342.4 Q1.3 v1(1015,3345) 1122.4,3345 C1.1 1277.4,3342.4 v1(1455,3520) ; C15.1 2701.58,1242.4 2724.18,1265 2745.82,1265 2765.82,1245 Q15.3 ; C13.1 2701.22,1942.4 2728.57,1969.75 v1(2730.43,1969.75) 2737.49,1969.75 2762.25,1945 Q13.3 ; C11.1 2701.58,2642.4 2716.52,2657.35 2732.65,2657.35 v1@2735,2655 ; v1(2720,1620) 2726.57,1620 2751.57,1595 Q14.3 ; v1@2726.91,3015 2735.86,3015 2755.86,2995 Q10.3 ; v1@2733.63,2315 v1@2740,2315 ; v1(2735,2665) v1@2735,2655 ; v1(2740,2320) 2765,2295 Q12.3 ; Q11.3 2765.82,2645 2753.48,2657.35 2737.35,2657.35 v1@2735,2655
  Bottom Layer w10: v1(1005,545) 1003.46,546.54 1003.46,890.86 v1(1001.92,892.4) 1000.96,893.36 1000.96,1239.04 v1(1000,1240) 1000.96,1240.96 1000.96,1593.36 v1(1001.92,1594.32) 1005,1597.4 v1(1005,1945) v1(1005,2290) 1010,2295 1010,2635 v1(1015,2640) v1(1015,2995) v1(1015,3345) ; v1(1455,3520) 1460,3525 2750,3525 U2.3 2825,3110 2735,3020 2735,3015 v1@2735,3010 ; v1(2720,1620) v1@2728.43,1620 ; v1(2730,3015) v1@2735,3010 ; v1(2735,1265) 2771.33,1301.33 2771.33,1587.82 2765.47,1593.67 2750.24,1593.67 2728.43,1615.48 v1@2728.43,1620 ; v1@2728.43,1620 2765,1656.57 2765,1935.19 v1(2730.43,1969.75) 2780,2019.32 2780,2280 v1(2740,2320) 2775,2355 2775,2625 v1(2735,2665) 2770,2700 2770,2975 v1@2735,3010
VSYS: J26.1 U1.39 | length 891.6
  Top Layer w10: U1.39 2730.43,3230.43 2815.67,3315.67 J26.1

## Polygon pours and split planes (outlines as drawn)
GND on Bottom Layer "NONET_L-01_P-001" (solid, pour order 0): 200,3800 0,3600 0,200 205,0 3600,0 3800,200 3800,210 3800,3595 3595,3800
GND on Top Layer "NONET_L-01_P-001" (solid, pour order 7): 200,3800 -0.63,3599.37 -0.63,198.22 204.37,-1.78 3599.37,-1.78 3799.37,198.22 3799.37,208.22 3799.37,3600.63 3600,3800

## Silkscreen, mask and mechanical layers (free items; w line width, h text height)
Mechanical 1:
  the board outline again, w10